# Altium PCB PCB1.PcbDoc
Units mil, origin at the board's own origin, x right, y up, seen from the top; angles counter-clockwise.
Board outline 6000 x 4000 mil, 2 copper layers (Top Layer, Bottom Layer); 11 components, 36 nets, 58 pads, 1 vias.
Unrouted connection lines stored in the file: 9.
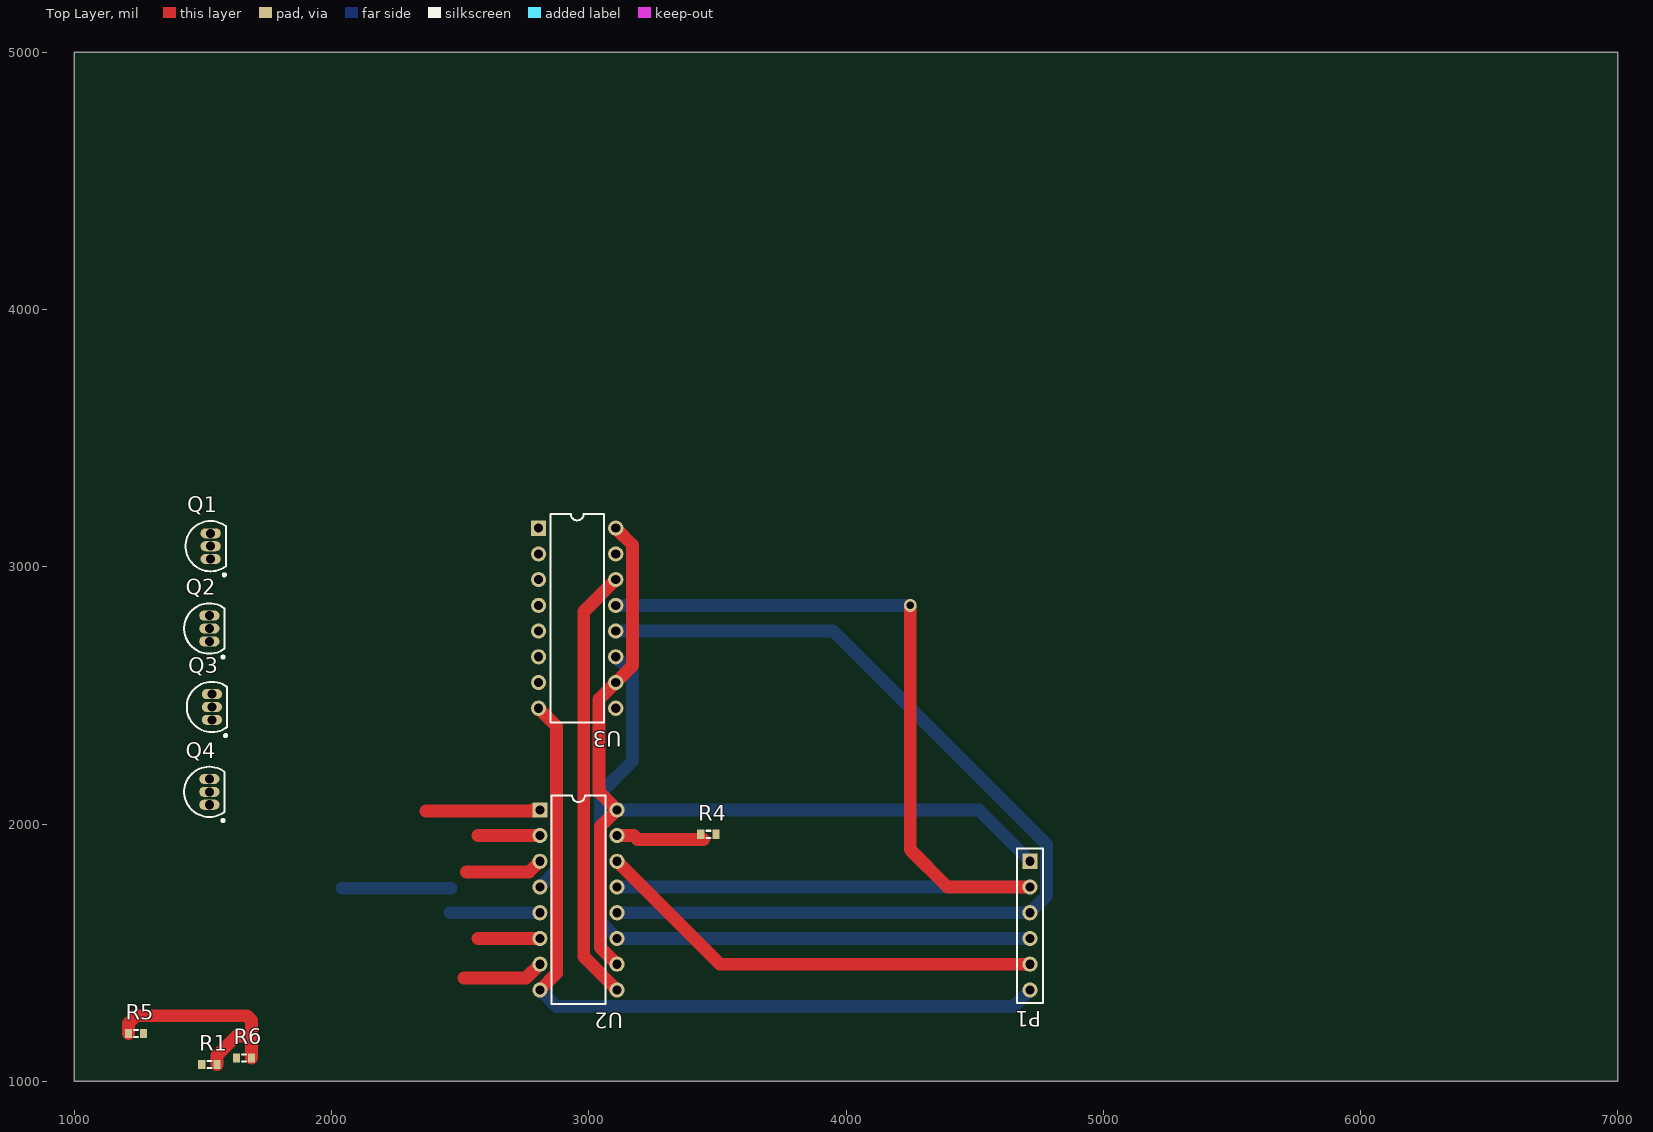
[diagram p0: Top Layer view]
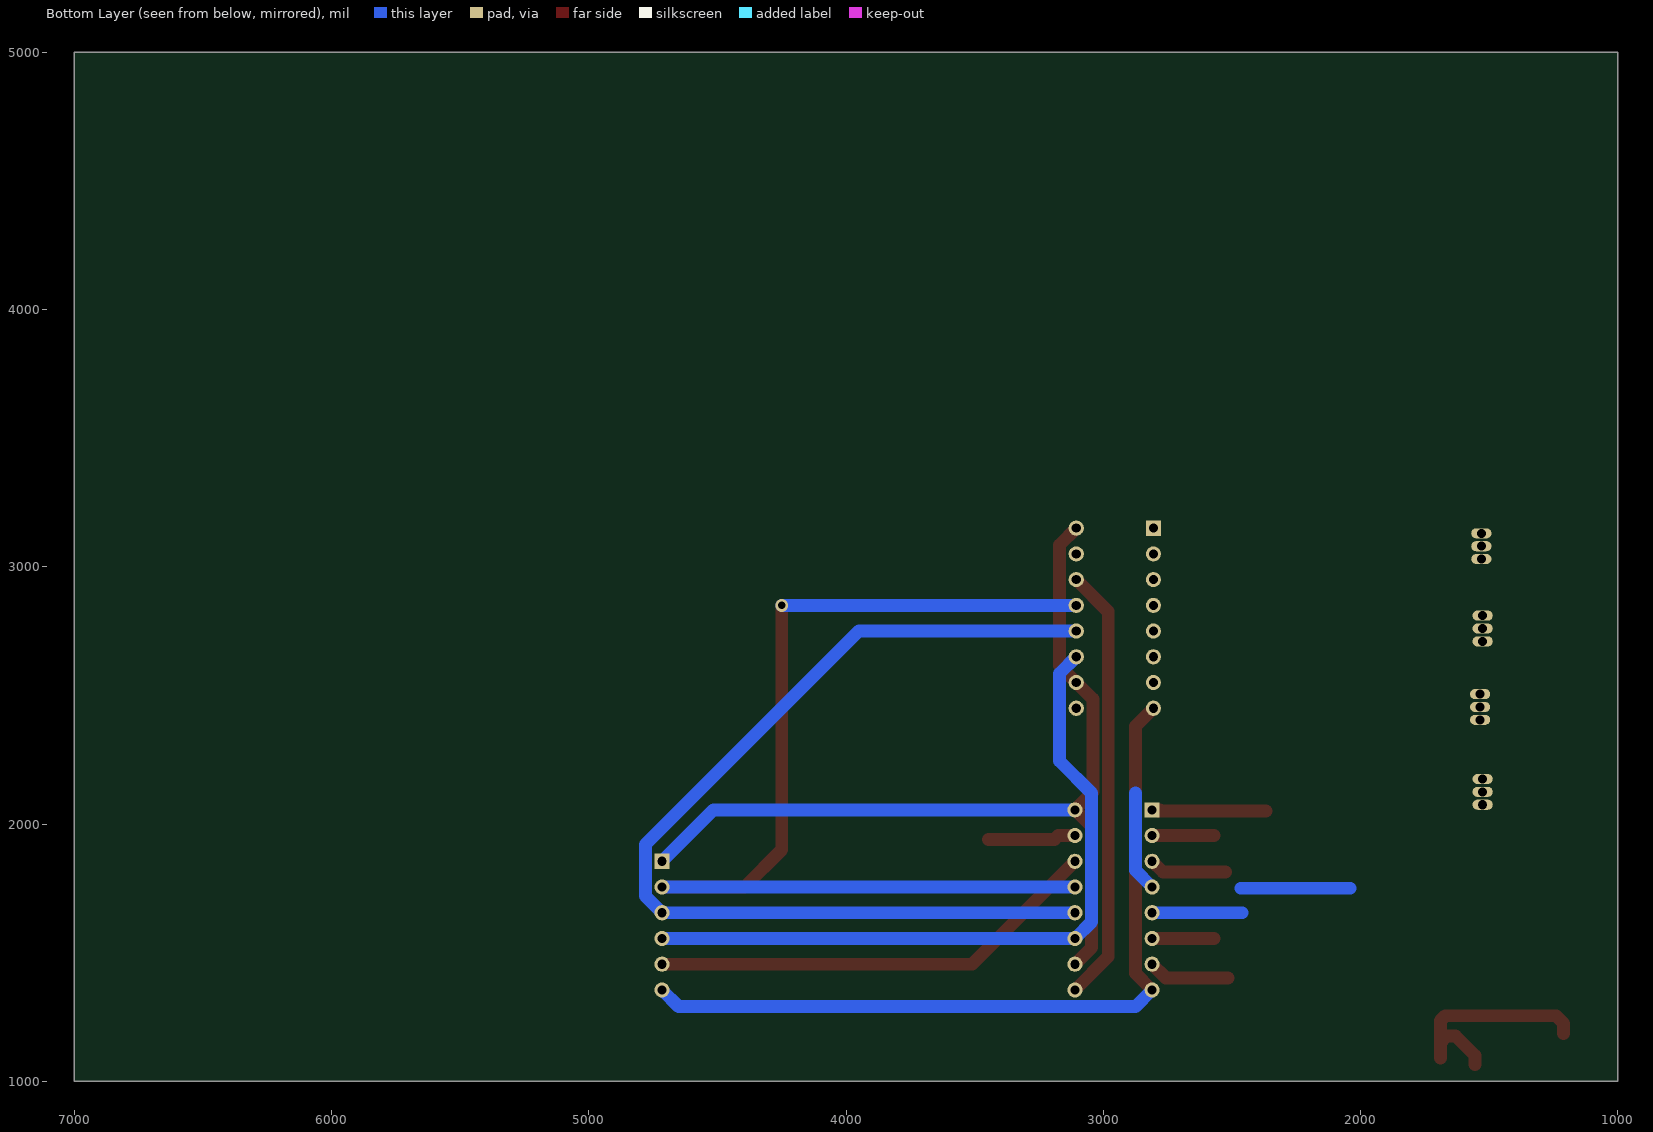
[diagram p1: Bottom Layer view, seen from below]

## Layer stack, top to bottom
Top Layer: signal copper 1.4
Dielectric: dielectric 12.6, FR-4, Dk 4.8
Bottom Layer: signal copper 1.4

## Board outline
1000,1000 7000,1000 7000,5000 1000,5000

## Design rules (kind name [scope] priority, off if disabled: settings)
Clearance [All] p1: gap=10
PolygonConnect [All] p1: connectstyle=Relief reliefconductorwidth=10 reliefentries=4 polygonreliefangle="90 Angle"
RoomDefinition Alarm [InComponentClass('Alarm')] p1: confinementstyle=ConfineIn formatcopy=TRUE lockcomponents=FALSE outline 7045,960 10795,960 10795,1890 7045,1890
RoutingCorners [All] p1: cornerstyle=90-Degree minsetback=0 maxsetback=0
RoutingPriority [(InNet('GNDLED') AND InNet('VCCLED'))] p1: routingpriority=0
RoutingVias [All] p1: holewidth=28 width=50 viastyle="Through Hole" minholewidth=28 minwidth=50 maxholewidth=28 maxwidth=50
SilkscreenOverComponentPads [All] p1: minsilkscreentomaskgap=10
SolderMaskExpansion [All] p1: expansion=4
Width [All] p1: maxlimit=100 minlimit=50 preferedwidth=50
25 further rules are at their usual default settings.

## Components (designator, comment, footprint, x,y, rotation, side; value= is the part's Value field where it differs from the comment)
P1 "Header 6" HDR1X6 4715,1855 r270 top
Q1 "9014" TO-92A 1530,3080 r0 top
Q2 "9014" TO-92A 1525,2760 r0 top
Q3 "9014" TO-92A 1535,2455 r0 top
Q4 "9014" TO-92A 1525,2125 r0 top
R1 "Res3" J1-0603 1525,1065 r0 top
R4 "Res3" J1-0603 3465,1960 r0 top
R5 "Res3" J1-0603 1240,1185 r0 top
R6 "Res3" J1-0603 1660,1090 r0 top
U2 "M74HC595B1R" DIP16 2960,1705 r270 top
U3 "M74HC595B1R" DIP16 2955,2800 r270 top

## Footprints (in the part's own frame and the unit in brackets; to place one, negate y for a bottom-side part, rotate by r counter-clockwise, add the part's x,y. Pads: shape width x height; smd on the part's side, far side on the other; paste and mask are expansions set on the pad)
DIP16 [mm] "DIP; 16 Leads; Row Spacing 7.62 mm; Pitch 2.54 mm"
  rect 1.5x1.5 hole 0.9: 1(-8.89,-3.81)
  round 1.5 hole 0.9: 2(-6.35,-3.81) 3(-3.81,-3.81) 4(-1.27,-3.81) 5(1.27,-3.81) 6(3.81,-3.81) 7(6.35,-3.81) 8(8.89,-3.81) 9(8.89,3.81) 10(6.35,3.81) 11(3.81,3.81) 12(1.27,3.81) 13(-1.27,3.81) 14(-3.81,3.81) 15(-6.35,3.81) 16(-8.89,3.81)
  silkscreen extent -10.3,-2.65 10.3,2.65
HDR1X6 [mm] "Connector; Header; 6 Position"
  rect 1.5x1.5 hole 0.9: 1(0,0)
  round 1.5 hole 0.9: 2(2.54,0) 3(5.08,0) 4(7.62,0) 5(10.16,0) 6(12.7,0)
  silkscreen extent -1.27,-1.27 13.97,1.27
J1-0603 [mm] "Chip Resistor, Body 1.6x0.8mm, IPC High Density"
  rect 0.7x0.9 smd: 1(-0.75,0) 2(0.75,0)
  silkscreen extent -0.2,-0.35 0.2,0.35, body extent -0.85,-0.48 0.85,0.48, height 0.9
TO-92A [mm] "TO, Flat Index; 3 In-Line, Axial Leads; Body Dia. 4.5mm; Leads 0.51 x 0.48 mm (max)"
  oval 2x1 hole 0.9: 1(0,-1.27) 2(0,0) 3(0,1.27)
  silkscreen extent -2.48,-2.95 1.5,2.48, body extent -2.5,-2.5 1.5,2.5, height 6.86

## Part data
P1: "Header, 6-Pin"
R1 R4 R5 R6: "Resistor"
U2 U3: "8 Bit Shift Register with Output Latches (3 STATE)"

## Via types
v1: diameter 50, hole 28, Top Layer to Bottom Layer, 1 vias

## Nets (pads, with @x,y where several pads share a name; then routed paths per layer and width w, separated by ;. In a path a pad name is that pad's centre, name@x,y a point inside that pad or via, vN(x,y) a via of type N, cw(c..) or ccw(c..) an arc to the next point about the centre after c; other vN are vias at no path point)
GND: 
GNDLED: P1.6 U2.8 U3.8 | length 3109.8
  Top Layer w50: U3.8 2875,2380 2875,1420 U2.8
  Bottom Layer w50: U2.8 2875,1290 4650,1290 P1.6
IR: R5.2
LEDA: R4.1 U2.15 | length 341.8
  Top Layer w50: U2.15 3175,1955 3190,1940 3445.58,1940
LEDB: U2.1 | length 424.6
  Top Layer w50: 2367.47,2050 2600,2050 2785,2050 2780,2055
LEDC: U2.2 | length 240.5
  Top Layer w50: 2569.53,1955 U2.2
LEDD: U2.3 | length 302.4
  Top Layer w50: 2525,1813 2768,1813 U2.3
LEDE: U2.4 | length 816.9
  Bottom Layer w50: 2040,1750 2465,1750 ; U2.4 2875,1820 2875,2120
LEDEA: Q1.2 U3.1
LEDEA2: Q1.1
LEDEB: Q2.2 U3.2
LEDEB2: Q2.1
LEDEC: Q3.2 U3.3
LEDEC2: Q3.1
LEDED: Q4.2 U3.4
LEDED2: Q4.1
LEDF: U2.5 | length 349
  Bottom Layer w50: 2461,1655 U2.5
LEDG: U2.6 | length 240.5
  Top Layer w50: 2569.53,1555 U2.6
LEDH: U2.7 | length 316.5
  Top Layer w50: 2515.47,1402 2757,1402 U2.7
Net_1: R4.2
Net_2: 
Net_3: 
Net_4: 
Net_5: 
Net_6: 
Net_7: 
Net_8: 
NetIR1_2: R6.1
NetU2_9: U2.9 U3.14 | length 1700.2
  Top Layer w50: U3.14 2980.47,2825.47 2980.47,1484.53 U2.9
NOE: P1.2 U2.13 U3.13 | length 4225.1
  Top Layer w50: v1(4250,2850) 4250,1900 4395,1755 P1.2
  Bottom Layer w50: U3.13 v1(4250,2850) ; U2.13 P1.2
RCLK: P1.3 U2.12 U3.12 | length 3915.7
  Bottom Layer w50: U3.12 3950,2750 4780,1920 4780,1720 P1.3 U2.12
SER: P1.5 U2.14 | length 1770.7
  Top Layer w50: U2.14 3510,1455 P1.5
SRCLK: P1.4 U2.11 U3.11 | length 2805.6
  Bottom Layer w50: U3.11 3170,2585 3170,2245 3045,2120 3045,1620 U2.11 P1.4
TEMP: R1.1
VCC: R1.2 R5.1 R6.2 | length 896.6
  Top Layer w50: R5.1 1210.47,1225 1239.94,1254.47 1670.06,1254.47 1689.53,1235 1689.53,1150 ; R1.2 1554.53,1100 1630.53,1176 1663.53,1176 1689.53,1150 ; R6.2 1689.53,1150
VCCLED: P1.1 Q1.3 Q2.3 Q3.3 Q4.3 U2.10 U2.16 U3.10 U3.16 | length 3546.1
  Top Layer w50: U3.16 3170,3085 3170,2615 U3.10 3040.47,2485.47 3040.47,2124.53 U2.16 3045,1990 3045,1520 U2.10
  Bottom Layer w50: U2.16 4515,2055 P1.1
pads on no net: U3.5 U3.6 U3.7 U3.9 U3.15